# Altium PCB SAMV71_Xplained_Ultra.PcbDoc (part 9 of 9)
Units mm, origin at the board's own origin, x right, y up, seen from the top; angles counter-clockwise.
Board outline 90 x 135 mm, 8 copper layers (Top Layer LF-Signals, Ground Plane 1 (GND), Power Plane (VCC), Ground Plane 2 (GND), Signal Layer 1, Signal Layer 2, Ground Plane 3 (GND), Bottom Layer LF-Signals), stack 1.632 mm thick; 483 components, 411 nets, 1994 pads, 1021 vias.
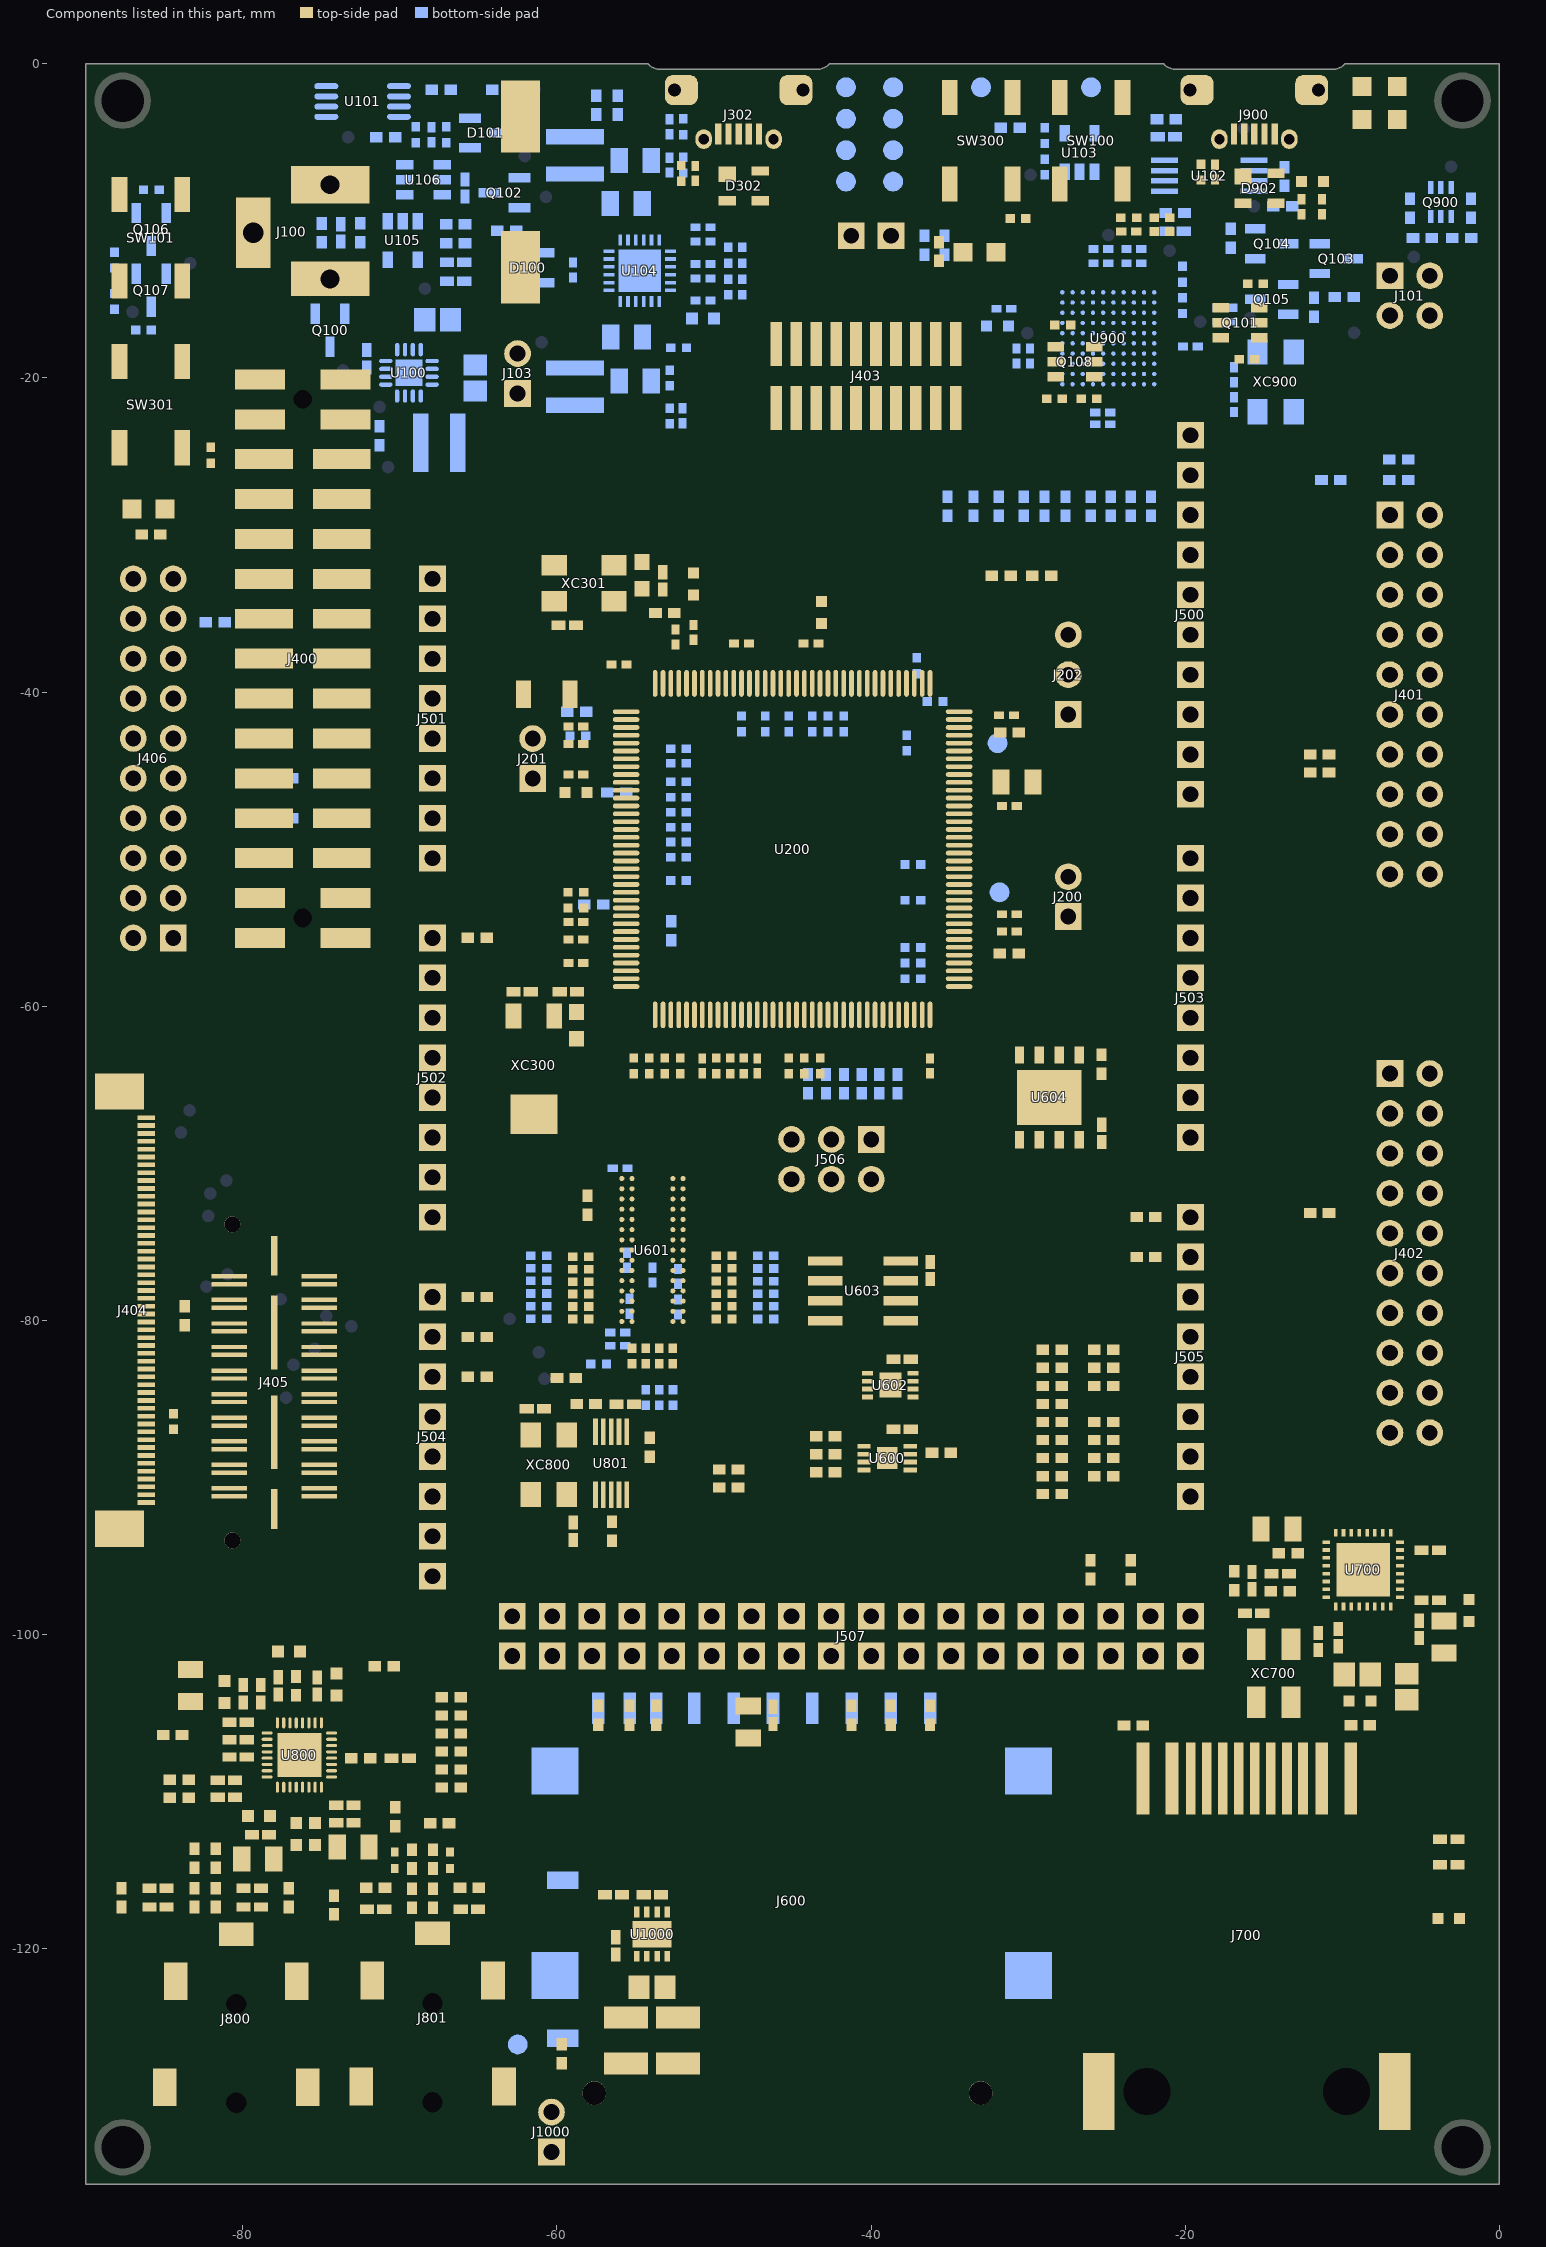
[diagram p14: the components of this part, seen from the top]

## Silkscreen, mask and mechanical layers (free items; w line width, h text height) (continued)
Test Jig Pin (M10):
  circle w0.5: c-2.35,-2.35 r1.5
  circle w0.5: c-2.35,-2.35 r2.5
  circle w0.5: c-2.35,-132.65 r2.5
  circle w0.5: c-87.65,-132.65 r2.5
  circle w0.5: c-87.65,-2.35 r2.5
  circle w0.5: c-87.65,-2.35 r1.5
  circle w0.5: c-87.65,-132.65 r1.5
  circle w0.5: c-2.35,-132.65 r1.5
  text "Mechanical 10 layer shows where pcb pushers will land on top of the PCB when placed in the jig." at -132.124,-157.095 h3
3D Bot (M12):
  circle w0.2: c-2.35,-132.65 r1.35
Title Top (M16):
  lines w0.127: -219,-126.915 -213.92,-126.915 ; -219,-56.255 -213.92,-56.255 ; -219,14.23 -213.92,14.23 ; -169.724,-197.4 -169.724,-192.32 ; -169.724,79.46 -169.724,84.54 ; -125.7,79.46 -125.7,84.54 ; -120.575,-197.4 -120.575,-192.32 ; -76.525,79.46 -76.525,84.54 ; -71.426,-197.4 -71.426,-192.32 ; -22.15,-197.4 -22.15,-192.32 ; -22.15,79.46 -22.15,84.54 ; 26.999,-197.4 26.999,-192.32 ; 26.999,79.46 26.999,84.54 ; 55.32,-184.7 169.62,-184.7 ; 55.32,-177.08 169.62,-177.08 ; 55.32,-169.46 93.42,-169.46 ; 76.148,-197.4 76.148,-192.32 ; 76.148,79.46 76.148,84.54 ; 93.42,-192.32 93.42,-177.08 93.42,-161.84 ; 125.424,-197.4 125.424,-192.32 ; 125.424,79.46 125.424,84.54 ; 146.76,-192.32 146.76,-177.08 ; 169.62,-126.915 174.7,-126.915 ; 169.62,-56.3 174.7,-56.3 ; 169.62,14.185 174.7,14.185 ; 55.32,-192.32 55.32,-161.84 ; 55.32,-192.32 169.62,-192.32 ; 55.32,-192.32 19.76,-192.32 19.76,-161.84 55.32,-161.84 ; 55.32,-161.84 93.42,-161.84 ; 93.42,-161.84 169.62,-161.84 169.62,-192.32 ; 169.62,-192.32 169.62,79.46 -213.92,79.46 -213.92,-192.32 169.62,-192.32 ; -219,-197.4 174.7,-197.4 174.7,84.54 -219,84.54 -219,-197.4
  lines w1: -110.4,-145.7 -110.4,19.6 14.6,19.6 14.6,-145.7 -110.4,-145.7
  text "1" at -194.963,81.111 h0.67
  text "4" at -47.372,81.111 h0.67
  text "5" at 1.904,81.111 h0.67
  text "6" at 50.926,81.111 h0.67
  text "7" at 100.456,81.111 h0.67
  text "8" at 149.478,81.111 h0.67
  text "2" at -148.474,80.975 h0.67
  text "3" at -101.924,80.825 h0.67
  text "A" at -217.095,47.301 h0.67
  text "A" at 171.525,47.256 h0.67
  text "B" at 171.605,-20.799 h0.67
  text "B" at -217.095,-23.311 h0.67
  text "C" at 172.25,-90.25 h0.67
  text "C" at -217.188,-91.488 h0.67
  text "D" at -217.095,-164.202 h0.67
  text "D" at 171.525,-164.202 h0.67
  text "ENGINEER:" at 56.59,-164.38 h0.67
  text "TITLE:" at 94.69,-164.38 h0.67
  text "PCB DESIGNER:" at 56.59,-171.873 h0.67
  text "B" at 20.75,-177 h22
  text "DATE:" at 56.59,-179.62 h0.67
  text "PART NO.:" at 94.69,-179.62 h0.67
  text "REV:" at 148.03,-179.62 h0.67
  text ".PRINT_DATE" at 56.7,-183.5 h0.67
  text "ATMEL NORWAY" at 24,-184.4 h0.67
  text "Vestre Rosten 79" at 23.97,-186.478 h0.67
  text "FILE NAME:" at 56.59,-187.24 h0.67
  text "DWG NO:" at 94.69,-187.24 h0.67
  text "SCALE:" at 148.03,-187.24 h0.67
  text "N-7075 Tiller" at 23.97,-189.78 h0.67
  text ".PCB_FILE_NAME_NO_PATH" at 57.86,-190.288 h0.67
  text "2" at -145.34,-195.688 h0.67
  text "3" at -95.81,-195.688 h0.67
  text "4" at -46.788,-195.688 h0.67
  text "5" at 1.904,-195.688 h0.67
  text "6" at 50.926,-195.688 h0.67
  text "7" at 100.456,-195.688 h0.67
  text "8" at 149.478,-195.688 h0.67

## Dimensions
0,0 to -15.6,-1.425 on Conn. Pos. (M4)
-15.1,-2.3 to 0,0 on Conn. Pos. (M4)
0,0 to -48.434,-1.425 on Conn. Pos. (M4)
0,0 to -26,-1.25 on TP Pos. (M5)
0,0 to -33,-1.25 on TP Pos. (M5)
0,0 to -38.6,-1.25 on TP Pos. (M5)
0,0 to -41.6,-1.25 on TP Pos. (M5)
-25.75,-1.5 to 0,0 on TP Pos. (M5)
-41.85,-5.5 to -41.85,-7.5 on TP Pos. (M5)
0,0 to 0,-135 on Dimentions (M6)
-89,-132.65 to -90,-135 on Dimentions (M6)
-90,-135 to -87.65,-134 on Dimentions (M6)
-9.825,0 to 0,0 on Dimentions (M6)
-21.375,0 to 0,0 on Dimentions (M6)
-54.209,0 to 0,0 on Dimentions (M6)
-42.659,0 to 0,0 on Dimentions (M6)
-90,-135 to 0,-135 on Dimentions (M6)
-5.7,-76.22 to 0,-135 on Conn. Pos. (M4)
-5.208,-75.72 to 0,-135 on Conn. Pos. (M4)
-5.233,-40.16 to 0,-135 on Conn. Pos. (M4)
-5.233,-14.76 to 0,-135 on Conn. Pos. (M4)
-90,-135 to -88.15,-79.85 on Conn. Pos. (M4)
-88.65,-79.35 to -90,-135 on Conn. Pos. (M4)
-87.65,-2.35 to -90.842,0.842 on Dimentions (M6)
-68.43,-78.509 to -90,-135 on Reserved (M8)
-68.43,-55.649 to -90,-135 on Reserved (M8)
-68.43,-32.789 to -90,-135 on Reserved (M8)
-45.575,-68.481 to -90,-135 on Reserved (M8)
-63.355,-98.834 to -90,-135 on Reserved (M8)
-90,-135 to -67.93,-96.789 on Reserved (M8)
-90,-135 to -62.855,-101.874 on Reserved (M8)
-90,-135 to -19.67,-91.709 on Reserved (M8)
-19.17,-73.429 to 0,-135 on Reserved (M8)
-19.17,-23.645 to 0,-135 on Reserved (M8)
-19.17,-50.569 to 0,-135 on Reserved (M8)
-42.53,-71.521 to -39.99,-71.521 on Reserved (M8)
-20.17,-46.505 to -20.17,-50.569 on Reserved (M8)

## Text inside footprints (layer, text, board x,y; h text height)
LABEL1: Bottom Overlay "PCBA LABEL" at -2.887,-120.521 h1.52 r270